# Altium PCB PCB1.PcbDoc (part 4 of 5)
Units mil, origin at the board's own origin, x right, y up, seen from the top; angles counter-clockwise.
Board outline 1280 x 1960 mil, 2 copper layers (Top Layer, Bottom Layer); 43 components, 63 nets, 300 pads, 93 vias.
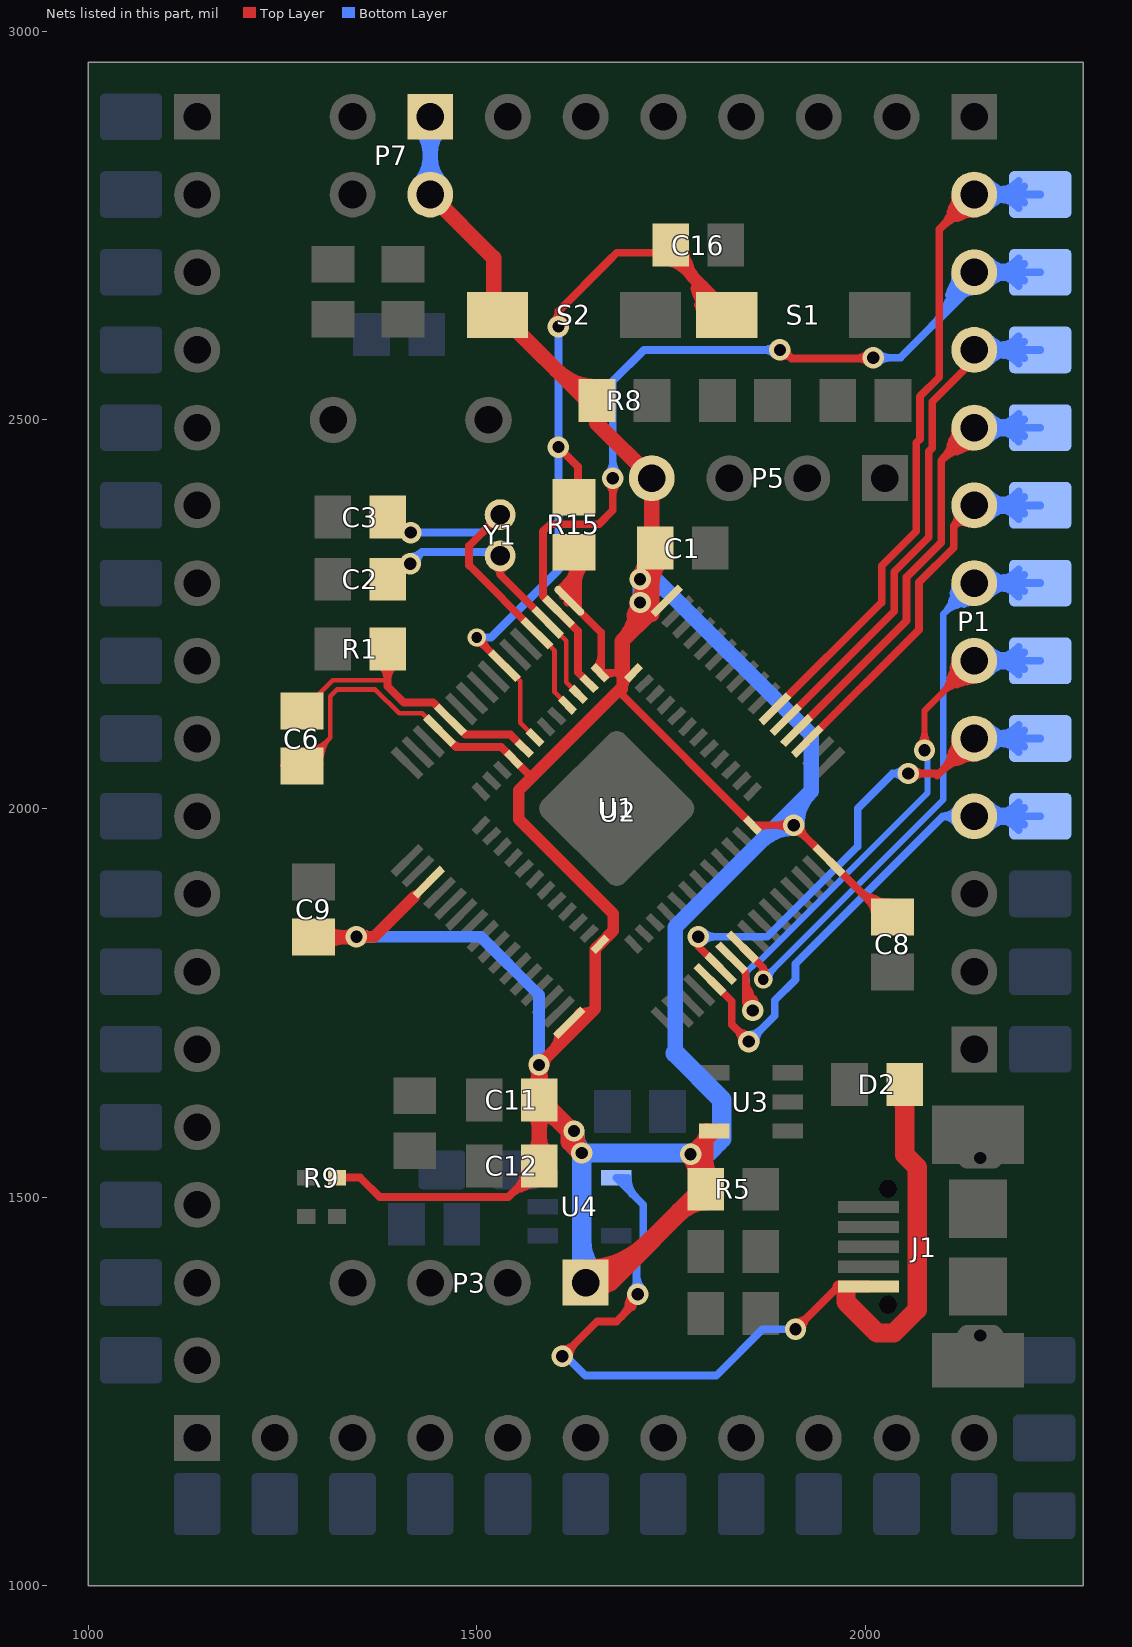
[diagram p4: the nets of this part, all layers, seen from the top]

## Via types
v1: diameter 27.56, hole 15.75, Top Layer to Bottom Layer, tented both sides, 87 vias
v2: diameter 23.62, hole 13.78, Top Layer to Bottom Layer, tented both sides, 6 vias

## Nets (pads, with @x,y where several pads share a name; then routed paths per layer and width w, separated by ;. In a path a pad name is that pad's centre, name@x,y a point inside that pad or via, vN(x,y) a via of type N, cw(c..) or ccw(c..) an arc to the next point about the centre after c; other vN are vias at no path point) (continued)
PC6: P1.4 pad.1@2225,1990 U2.37 | length 1805.9
  Top Layer w10: U2.37@1799.99,1780.06 1828,1752.05 1828,1722 v1(1850,1700) ; 1838.77,1709.15 ccw(c1852.64,1712.87) v1@1849.76,1698.8 ; 1840.85,1711.23 cw(c1837.13,1697.36) v1@1851.2,1700.24 ; 1835.01,1714.99 cw(c1820.02,1700) 1841.22,1700 ccw(c1820.02,1700) 1835.01,1714.99 ; 1835.01,1714.99 ccw(c1850,1729.98) 1850,1708.78 cw(c1850,1729.98) 1835.01,1714.99
  Bottom Layer w10: v1(1850,1700) 1883.22,1733.18 1883.22,1753.03 1910,1779.81 1910,1800.22 2099.78,1990 ; P1.4@2160.62,1976.72 cw(c2174.28,1967.93) 2178.48,1983.61 cw(c2184.22,2005.04) P1.4@2163.22,1997.9 ; P1.4@2160.62,2003.28 ccw(c2174.28,2012.07) 2178.48,1996.39 ccw(c2184.22,1974.96) P1.4@2163.22,1982.1 ; pad.1@2225,1990 P1.4@2140,1990 2099.78,1990 ; 2099.78,1990 cw(c2099.78,1969.28) 2118.19,1978.77 ccw(c2099.78,1969.28) 2099.78,1990 ; 2099.78,1990 ccw(c2099.78,2010.72) 2118.19,2001.23 cw(c2099.78,2010.72) 2099.78,1990 ; P1.4@2154.64,1990 cw(c2154.64,1929.64) 2197.32,1972.32 ccw(c2154.64,1929.64) P1.4@2154.64,1990 ; P1.4@2154.64,1990 ccw(c2154.64,2050.36) 2197.32,2007.68 cw(c2154.64,2050.36) P1.4@2154.64,1990 ; 2175.07,1990 cw(c2175.07,2025.07) 2150.27,2000.27 ccw(c2175.07,2025.07) 2175.07,1990 ; 2175.07,1990 ccw(c2175.07,1954.93) 2150.27,1979.73 cw(c2175.07,1954.93) 2175.07,1990 ; 2176.44,1983.9 cw(c2180.44,1968.97) pad.1@2193.64,1977.01 ; 2176.44,1983.9 ccw(c2170.88,2004.65) pad.1@2191.27,1997.88 ; 2176.44,1983.9 cw(c2180.44,1968.97) pad.1@2193.64,1977.01 ; 2176.44,1983.9 ccw(c2170.88,2004.65) pad.1@2191.27,1997.88 ; 2176.44,1983.9 cw(c2180.44,1968.97) pad.1@2193.64,1977.01 ; 2176.44,1983.9 ccw(c2170.88,2004.65) pad.1@2191.27,1997.88 ; 2176.44,1996.1 cw(c2170.88,1975.35) pad.1@2191.27,1982.12 ; 2176.44,1996.1 ccw(c2180.44,2011.03) pad.1@2193.64,2002.99 ; 2176.44,1996.1 cw(c2170.88,1975.35) pad.1@2191.27,1982.12 ; 2176.44,1996.1 ccw(c2180.44,2011.03) pad.1@2193.64,2002.99 ; 2176.44,1996.1 cw(c2170.88,1975.35) pad.1@2191.27,1982.12 ; 2176.44,1996.1 ccw(c2180.44,2011.03) pad.1@2193.64,2002.99 ; 2178.79,1990 cw(c2178.79,1953.79) 2204.39,1979.39 ccw(c2178.79,1953.79) 2178.79,1990 ; 2178.79,1990 ccw(c2178.79,2026.21) 2204.39,2000.61 cw(c2178.79,2026.21) 2178.79,1990 ; pad.1@2199.21,1990 cw(c2199.21,2049.21) 2157.34,2007.34 ccw(c2199.21,2049.21) pad.1@2199.21,1990 ; pad.1@2199.21,1990 ccw(c2199.21,1930.79) 2157.34,1972.66 cw(c2199.21,1930.79) pad.1@2199.21,1990 ; v1@1850,1708.78 ccw(c1850,1730.08) 1865.06,1715.02 cw(c1850,1730.08) v1@1850,1708.78 ; v1@1858.78,1700 cw(c1879.87,1700) 1864.96,1714.91 ccw(c1879.87,1700) v1@1858.78,1700
PC7: P1.5 pad.1@2225,2090 U2.38 | length 2145.3
  Top Layer w10: v1(1785,1835) 1785,1822.88 U2.38@1813.91,1793.98 ; v1(2055,2045) 2090,2045 2092.5,2042.5 P1.5@2140,2090 ; 2109.48,2067.65 cw(c2146.61,2057.7) P1.5@2138.9,2095.36 ; 2117.65,2059.48 ccw(c2107.7,2096.61) P1.5@2145.36,2088.9 ; 2076.2,2045 cw(c2076.2,2066.2) 2061.21,2051.21 ccw(c2076.2,2066.2) 2076.2,2045 ; 2076.2,2045 ccw(c2076.2,2023.8) 2061.21,2038.79 cw(c2076.2,2023.8) 2076.2,2045 ; 2098.13,2048.13 cw(c2140,2006.26) 2140,2065.47 ccw(c2140,2006.26) 2098.13,2048.13 ; 2098.13,2048.13 ccw(c2056.26,2090) 2115.47,2090 cw(c2056.26,2090) 2098.13,2048.13 ; 2115.2,2065.2 cw(c2140,2040.4) 2140,2075.47 ccw(c2140,2040.4) 2115.2,2065.2 ; 2115.2,2065.2 ccw(c2090.4,2090) 2125.47,2090 cw(c2090.4,2090) 2115.2,2065.2
  Bottom Layer w10: v1(1785,1835) 1873.79,1835 1990,1951.21 1990,2000 2035,2045 ; v1@2065,2045 2035,2045 ; P1.5@2140,2090 pad.1@2225,2090 ; P1.5@2160.62,2076.72 cw(c2174.28,2067.93) 2178.48,2083.61 cw(c2184.22,2105.04) P1.5@2163.22,2097.9 ; P1.5@2160.62,2103.28 ccw(c2174.28,2112.07) 2178.48,2096.39 ccw(c2184.22,2074.96) P1.5@2163.22,2082.1 ; 1806.2,1835 cw(c1806.2,1856.2) 1791.21,1841.21 ccw(c1806.2,1856.2) 1806.2,1835 ; 1806.2,1835 ccw(c1806.2,1813.8) 1791.21,1828.79 cw(c1806.2,1813.8) 1806.2,1835 ; 2035,2045 cw(c2035,2026.61) 2048.54,2039.06 ccw(c2035,2026.61) 2035,2045 ; 2035,2045 ccw(c2035,2063.39) 2048.54,2050.94 cw(c2035,2063.39) 2035,2045 ; P1.5@2154.64,2090 cw(c2154.64,2029.64) 2197.32,2072.32 ccw(c2154.64,2029.64) P1.5@2154.64,2090 ; P1.5@2154.64,2090 ccw(c2154.64,2150.36) 2197.32,2107.68 cw(c2154.64,2150.36) P1.5@2154.64,2090 ; 2175.07,2090 cw(c2175.07,2125.07) 2150.27,2100.27 ccw(c2175.07,2125.07) 2175.07,2090 ; 2175.07,2090 ccw(c2175.07,2054.93) 2150.27,2079.73 cw(c2175.07,2054.93) 2175.07,2090 ; 2176.44,2083.9 cw(c2180.44,2068.97) pad.1@2193.64,2077.01 ; 2176.44,2083.9 ccw(c2170.88,2104.65) pad.1@2191.27,2097.88 ; 2176.44,2083.9 cw(c2180.44,2068.97) pad.1@2193.64,2077.01 ; 2176.44,2083.9 ccw(c2170.88,2104.65) pad.1@2191.27,2097.88 ; 2176.44,2083.9 cw(c2180.44,2068.97) pad.1@2193.64,2077.01 ; 2176.44,2083.9 ccw(c2170.88,2104.65) pad.1@2191.27,2097.88 ; 2176.44,2096.1 cw(c2170.88,2075.35) pad.1@2191.27,2082.12 ; 2176.44,2096.1 ccw(c2180.44,2111.03) pad.1@2193.64,2102.99 ; 2176.44,2096.1 cw(c2170.88,2075.35) pad.1@2191.27,2082.12 ; 2176.44,2096.1 ccw(c2180.44,2111.03) pad.1@2193.64,2102.99 ; 2176.44,2096.1 cw(c2170.88,2075.35) pad.1@2191.27,2082.12 ; 2176.44,2096.1 ccw(c2180.44,2111.03) pad.1@2193.64,2102.99 ; 2178.79,2090 cw(c2178.79,2053.79) 2204.39,2079.39 ccw(c2178.79,2053.79) 2178.79,2090 ; 2178.79,2090 ccw(c2178.79,2126.21) 2204.39,2100.61 cw(c2178.79,2126.21) 2178.79,2090 ; pad.1@2199.21,2090 cw(c2199.21,2149.21) 2157.34,2107.34 ccw(c2199.21,2149.21) pad.1@2199.21,2090 ; pad.1@2199.21,2090 ccw(c2199.21,2030.79) 2157.34,2072.66 cw(c2199.21,2030.79) pad.1@2199.21,2090
PC8: P1.6 pad.1@2225,2190 U2.39 | length 2879.8
  Top Layer w8: v1(2076,2075) 2076,2126 P1.6@2140,2190 ; 2105.21,2155.45 cw(c2149.51,2143.58) P1.6@2140.31,2188.5 ; 2105.45,2155.21 ccw(c2093.58,2199.51) P1.6@2138.5,2190.31 ; 2108.57,2167.96 cw(c2146.6,2157.76) P1.6@2138.7,2196.34 ; 2111.27,2162 cw(c2130.54,2151.85) P1.6@2135.78,2172.99 ; 2111.92,2180.46 cw(c2143.7,2171.95) P1.6@2137.1,2204.18 ; 2112,2161.27 ccw(c2101.85,2180.54) P1.6@2122.99,2185.78 ; 2114.25,2167.66 ccw(c2097.1,2176.7) P1.6@2115.62,2182.44 ; P1.6@2115.59,2182.53 cw(c2094.02,2175.92) 2110.08,2160.08 ; P1.6@2115.64,2182.38 cw(c2094.58,2175.79) 2110.08,2160.08 ; P1.6@2115.68,2182.24 cw(c2095.07,2175.67) 2110.47,2160.47 ; P1.6@2115.73,2182.09 cw(c2095.61,2175.53) 2110.47,2160.47 ; 2116.03,2171.03 cw(c2133.07,2162.06) P1.6@2137.71,2180.75 ; 2117.66,2164.25 cw(c2126.7,2147.1) P1.6@2132.44,2165.62 ; 2117.96,2158.57 ccw(c2107.76,2196.6) P1.6@2146.34,2188.7 ; 2121.03,2166.03 ccw(c2112.06,2183.07) P1.6@2130.75,2187.71 ; 2130.46,2161.92 ccw(c2121.95,2193.7) P1.6@2154.18,2187.1 ; P1.6@2132.09,2165.73 ccw(c2125.53,2145.61) 2110.47,2160.47 ; P1.6@2132.24,2165.68 ccw(c2125.67,2145.07) 2110.47,2160.47 ; P1.6@2132.38,2165.64 ccw(c2125.79,2144.58) 2110.08,2160.08 ; P1.6@2132.53,2165.59 ccw(c2125.92,2144.02) 2110.08,2160.08 ; 2076,2098.61 cw(c2052.39,2098.61) 2069.08,2081.92 ccw(c2052.39,2098.61) 2076,2098.61 ; 2076,2098.61 ccw(c2099.61,2098.61) 2082.92,2081.92 cw(c2099.61,2098.61) 2076,2098.61 ; 2096.42,2146.42 cw(c2140,2102.84) 2140,2164.47 ccw(c2140,2102.84) 2096.42,2146.42 ; 2096.42,2146.42 ccw(c2052.84,2190) 2114.47,2190 cw(c2052.84,2190) 2096.42,2146.42 ; 2110.08,2160.08 cw(c2140,2130.16) 2140,2172.47 ccw(c2140,2130.16) 2110.08,2160.08 ; 2110.08,2160.08 ccw(c2080.16,2190) 2122.47,2190 cw(c2080.16,2190) 2110.08,2160.08
  Top Layer w9: U2.39@1827.83,1807.9 1845.62,1790.1 1845.62,1749.38 v1(1855,1740) ; v1@1846.89,1744.51 ccw(c1837.86,1749.55) 1846.81,1754.72 ccw(c1856.31,1760.2) v1@1855.6,1749.26 ; v1@1848.04,1746.13 ccw(c1834.89,1757.72) 1850.06,1766.48 ; v1@1854.79,1740.18 ccw(c1844.81,1748.98) 1856.33,1755.63 ; U2.39@1841.62,1793.4 cw(c1831.95,1783.73) 1845.62,1783.73 ccw(c1831.95,1783.73) U2.39@1841.62,1793.4 ; U2.39@1841.86,1793.27 cw(c1840.83,1788.59) 1845.62,1788.59 ccw(c1840.83,1788.59) U2.39@1841.86,1793.27 ; 1845.62,1763.32 ccw(c1878.32,1763.32) 1855.2,1740.2 cw(c1878.32,1763.32) 1845.62,1763.32 ; 1845.62,1785.04 ccw(c1900.04,1785.04) 1861.56,1746.56 cw(c1900.04,1785.04) 1845.62,1785.04
  Bottom Layer w8: 1846.75,1753.25 1846.75,1789.03 1859.53,1801.81 1861.81,1801.81 2080,2020 v1@2080,2075
  Bottom Layer w10: P1.6@2140,2190 pad.1@2225,2190 ; P1.6@2160.62,2176.72 cw(c2174.28,2167.93) 2178.48,2183.61 cw(c2184.22,2205.04) P1.6@2163.22,2197.9 ; P1.6@2160.62,2203.28 ccw(c2174.28,2212.07) 2178.48,2196.39 ccw(c2184.22,2174.96) P1.6@2163.22,2182.1 ; P1.6@2154.64,2190 cw(c2154.64,2129.64) 2197.32,2172.32 ccw(c2154.64,2129.64) P1.6@2154.64,2190 ; P1.6@2154.64,2190 ccw(c2154.64,2250.36) 2197.32,2207.68 cw(c2154.64,2250.36) P1.6@2154.64,2190 ; 2175.07,2190 cw(c2175.07,2225.07) 2150.27,2200.27 ccw(c2175.07,2225.07) 2175.07,2190 ; 2175.07,2190 ccw(c2175.07,2154.93) 2150.27,2179.73 cw(c2175.07,2154.93) 2175.07,2190 ; 2176.44,2183.9 cw(c2180.44,2168.97) pad.1@2193.64,2177.01 ; 2176.44,2183.9 ccw(c2170.88,2204.65) pad.1@2191.27,2197.88 ; 2176.44,2183.9 cw(c2180.44,2168.97) pad.1@2193.64,2177.01 ; 2176.44,2183.9 ccw(c2170.88,2204.65) pad.1@2191.27,2197.88 ; 2176.44,2183.9 cw(c2180.44,2168.97) pad.1@2193.64,2177.01 ; 2176.44,2183.9 ccw(c2170.88,2204.65) pad.1@2191.27,2197.88 ; 2176.44,2196.1 cw(c2170.88,2175.35) pad.1@2191.27,2182.12 ; 2176.44,2196.1 ccw(c2180.44,2211.03) pad.1@2193.64,2202.99 ; 2176.44,2196.1 cw(c2170.88,2175.35) pad.1@2191.27,2182.12 ; 2176.44,2196.1 ccw(c2180.44,2211.03) pad.1@2193.64,2202.99 ; 2176.44,2196.1 cw(c2170.88,2175.35) pad.1@2191.27,2182.12 ; 2176.44,2196.1 ccw(c2180.44,2211.03) pad.1@2193.64,2202.99 ; 2178.79,2190 cw(c2178.79,2153.79) 2204.39,2179.39 ccw(c2178.79,2153.79) 2178.79,2190 ; 2178.79,2190 ccw(c2178.79,2226.21) 2204.39,2200.61 cw(c2178.79,2226.21) 2178.79,2190 ; pad.1@2199.21,2190 cw(c2199.21,2249.21) 2157.34,2207.34 ccw(c2199.21,2249.21) pad.1@2199.21,2190 ; pad.1@2199.21,2190 ccw(c2199.21,2130.79) 2157.34,2172.66 cw(c2199.21,2130.79) pad.1@2199.21,2190
PC9: P1.7 pad.1@2225,2290 U2.40 | length 2245.3
  Top Layer w10: U2.40@1841.75,1821.81 1868.56,1795 ; v2(1868.56,1780) 1868.56,1795 ; 1868.56,1795 cw(c1855.45,1795) 1864.08,1785.13 ccw(c1855.45,1795) 1868.56,1795 ; 1868.56,1795 ccw(c1881.67,1795) 1873.04,1785.13 cw(c1881.67,1795) 1868.56,1795
  Bottom Layer w8: v2(1868.56,1780) 2100,2011.44 2100,2250 ; 2109.3,2262.57 cw(c2153.84,2253.57) P1.7@2137.7,2296.05 ; 2112.17,2276.79 cw(c2147.75,2269.6) P1.7@2134.86,2303.53 ; 2112.57,2259.3 ccw(c2103.57,2303.84) P1.7@2146.05,2287.7 ; 2126.79,2262.17 ccw(c2119.6,2297.75) P1.7@2153.53,2284.86 ; P1.7@2140,2290 2100,2250 ; 1881.9,1793.33 cw(c1868.56,1806.67) 1868.56,1787.81 ccw(c1868.56,1806.67) 1881.9,1793.33 ; 1881.9,1793.33 ccw(c1895.23,1780) 1876.37,1780 cw(c1895.23,1780) 1881.9,1793.33 ; 2100,2250 cw(c2135.29,2214.71) 2138.41,2264.52 ccw(c2135.29,2214.71) 2100,2250 ; 2100,2250 ccw(c2064.71,2285.29) 2114.52,2288.41 cw(c2064.71,2285.29) 2100,2250 ; 2112.54,2262.54 cw(c2136.77,2238.31) 2138.91,2272.51 ccw(c2136.77,2238.31) 2112.54,2262.54 ; 2112.54,2262.54 ccw(c2088.31,2286.77) 2122.51,2288.91 cw(c2088.31,2286.77) 2112.54,2262.54
  Bottom Layer w10: P1.7@2140,2290 pad.1@2225,2290 ; P1.7@2160.62,2276.72 cw(c2174.28,2267.93) 2178.48,2283.61 cw(c2184.22,2305.04) P1.7@2163.22,2297.9 ; P1.7@2160.62,2303.28 ccw(c2174.28,2312.07) 2178.48,2296.39 ccw(c2184.22,2274.96) P1.7@2163.22,2282.1 ; P1.7@2154.64,2290 cw(c2154.64,2229.64) 2197.32,2272.32 ccw(c2154.64,2229.64) P1.7@2154.64,2290 ; P1.7@2154.64,2290 ccw(c2154.64,2350.36) 2197.32,2307.68 cw(c2154.64,2350.36) P1.7@2154.64,2290 ; 2175.07,2290 cw(c2175.07,2325.07) 2150.27,2300.27 ccw(c2175.07,2325.07) 2175.07,2290 ; 2175.07,2290 ccw(c2175.07,2254.93) 2150.27,2279.73 cw(c2175.07,2254.93) 2175.07,2290 ; 2176.44,2283.9 cw(c2180.44,2268.97) pad.1@2193.64,2277.01 ; 2176.44,2283.9 ccw(c2170.88,2304.65) pad.1@2191.27,2297.88 ; 2176.44,2283.9 cw(c2180.44,2268.97) pad.1@2193.64,2277.01 ; 2176.44,2283.9 ccw(c2170.88,2304.65) pad.1@2191.27,2297.88 ; 2176.44,2283.9 cw(c2180.44,2268.97) pad.1@2193.64,2277.01 ; 2176.44,2283.9 ccw(c2170.88,2304.65) pad.1@2191.27,2297.88 ; 2176.44,2296.1 cw(c2170.88,2275.35) pad.1@2191.27,2282.12 ; 2176.44,2296.1 ccw(c2180.44,2311.03) pad.1@2193.64,2302.99 ; 2176.44,2296.1 cw(c2170.88,2275.35) pad.1@2191.27,2282.12 ; 2176.44,2296.1 ccw(c2180.44,2311.03) pad.1@2193.64,2302.99 ; 2176.44,2296.1 cw(c2170.88,2275.35) pad.1@2191.27,2282.12 ; 2176.44,2296.1 ccw(c2180.44,2311.03) pad.1@2193.64,2302.99 ; 2178.79,2290 cw(c2178.79,2253.79) 2204.39,2279.39 ccw(c2178.79,2253.79) 2178.79,2290 ; 2178.79,2290 ccw(c2178.79,2326.21) 2204.39,2300.61 cw(c2178.79,2326.21) 2178.79,2290 ; pad.1@2199.21,2290 cw(c2199.21,2349.21) 2157.34,2307.34 ccw(c2199.21,2349.21) pad.1@2199.21,2290 ; pad.1@2199.21,2290 ccw(c2199.21,2230.79) 2157.34,2272.66 cw(c2199.21,2230.79) pad.1@2199.21,2290
PC10: P1.8 pad.1@2225,2390 U2.51 | length 1484
  Top Layer w10: U2.51@1925.26,2086.28 2069,2230.02 2069,2291.12 2113.53,2335.65 2113.53,2363.53 ; P1.8@2140,2390 2113.53,2363.53 ; 2113.53,2363.53 cw(c2125.06,2352) 2131.03,2367.17 ccw(c2125.06,2352) 2113.53,2363.53 ; 2113.53,2363.53 ccw(c2102,2375.06) 2117.17,2381.03 cw(c2102,2375.06) 2113.53,2363.53
  Bottom Layer w10: P1.8@2140,2390 pad.1@2225,2390 ; P1.8@2160.62,2376.72 cw(c2174.28,2367.93) 2178.48,2383.61 cw(c2184.22,2405.04) P1.8@2163.22,2397.9 ; P1.8@2160.62,2403.28 ccw(c2174.28,2412.07) 2178.48,2396.39 ccw(c2184.22,2374.96) P1.8@2163.22,2382.1 ; P1.8@2154.64,2390 cw(c2154.64,2329.64) 2197.32,2372.32 ccw(c2154.64,2329.64) P1.8@2154.64,2390 ; P1.8@2154.64,2390 ccw(c2154.64,2450.36) 2197.32,2407.68 cw(c2154.64,2450.36) P1.8@2154.64,2390 ; 2175.07,2390 cw(c2175.07,2425.07) 2150.27,2400.27 ccw(c2175.07,2425.07) 2175.07,2390 ; 2175.07,2390 ccw(c2175.07,2354.93) 2150.27,2379.73 cw(c2175.07,2354.93) 2175.07,2390 ; 2176.44,2383.9 cw(c2180.44,2368.97) pad.1@2193.64,2377.01 ; 2176.44,2383.9 ccw(c2170.88,2404.65) pad.1@2191.27,2397.88 ; 2176.44,2383.9 cw(c2180.44,2368.97) pad.1@2193.64,2377.01 ; 2176.44,2383.9 ccw(c2170.88,2404.65) pad.1@2191.27,2397.88 ; 2176.44,2383.9 cw(c2180.44,2368.97) pad.1@2193.64,2377.01 ; 2176.44,2383.9 ccw(c2170.88,2404.65) pad.1@2191.27,2397.88 ; 2176.44,2396.1 cw(c2170.88,2375.35) pad.1@2191.27,2382.12 ; 2176.44,2396.1 ccw(c2180.44,2411.03) pad.1@2193.64,2402.99 ; 2176.44,2396.1 cw(c2170.88,2375.35) pad.1@2191.27,2382.12 ; 2176.44,2396.1 ccw(c2180.44,2411.03) pad.1@2193.64,2402.99 ; 2176.44,2396.1 cw(c2170.88,2375.35) pad.1@2191.27,2382.12 ; 2176.44,2396.1 ccw(c2180.44,2411.03) pad.1@2193.64,2402.99 ; 2178.79,2390 cw(c2178.79,2353.79) 2204.39,2379.39 ccw(c2178.79,2353.79) 2178.79,2390 ; 2178.79,2390 ccw(c2178.79,2426.21) 2204.39,2400.61 cw(c2178.79,2426.21) 2178.79,2390 ; pad.1@2199.21,2390 cw(c2199.21,2449.21) 2157.34,2407.34 ccw(c2199.21,2449.21) pad.1@2199.21,2390 ; pad.1@2199.21,2390 ccw(c2199.21,2330.79) 2157.34,2372.66 cw(c2199.21,2330.79) pad.1@2199.21,2390
PC11: P1.9 pad.1@2225,2490 U2.52 | length 1881.5
  Top Layer w10: U2.52@1911.34,2100.2 2053,2241.86 2053,2297.75 2097.53,2342.27 2097.53,2447.53 P1.9@2140,2490 ; 2109.48,2467.65 cw(c2146.61,2457.7) P1.9@2138.9,2495.36 ; 2117.65,2459.48 ccw(c2107.7,2496.61) P1.9@2145.36,2488.9 ; 2098.13,2448.13 cw(c2140,2406.26) 2140,2465.47 ccw(c2140,2406.26) 2098.13,2448.13 ; 2098.13,2448.13 ccw(c2056.26,2490) 2115.47,2490 cw(c2056.26,2490) 2098.13,2448.13 ; 2115.2,2465.2 cw(c2140,2440.4) 2140,2475.47 ccw(c2140,2440.4) 2115.2,2465.2 ; 2115.2,2465.2 ccw(c2090.4,2490) 2125.47,2490 cw(c2090.4,2490) 2115.2,2465.2
  Bottom Layer w10: P1.9@2140,2490 pad.1@2225,2490 ; P1.9@2160.62,2476.72 cw(c2174.28,2467.93) 2178.48,2483.61 cw(c2184.22,2505.04) P1.9@2163.22,2497.9 ; P1.9@2160.62,2503.28 ccw(c2174.28,2512.07) 2178.48,2496.39 ccw(c2184.22,2474.96) P1.9@2163.22,2482.1 ; P1.9@2154.64,2490 cw(c2154.64,2429.64) 2197.32,2472.32 ccw(c2154.64,2429.64) P1.9@2154.64,2490 ; P1.9@2154.64,2490 ccw(c2154.64,2550.36) 2197.32,2507.68 cw(c2154.64,2550.36) P1.9@2154.64,2490 ; 2175.07,2490 cw(c2175.07,2525.07) 2150.27,2500.27 ccw(c2175.07,2525.07) 2175.07,2490 ; 2175.07,2490 ccw(c2175.07,2454.93) 2150.27,2479.73 cw(c2175.07,2454.93) 2175.07,2490 ; 2176.44,2483.9 cw(c2180.44,2468.97) pad.1@2193.64,2477.01 ; 2176.44,2483.9 ccw(c2170.88,2504.65) pad.1@2191.27,2497.88 ; 2176.44,2483.9 cw(c2180.44,2468.97) pad.1@2193.64,2477.01 ; 2176.44,2483.9 ccw(c2170.88,2504.65) pad.1@2191.27,2497.88 ; 2176.44,2483.9 cw(c2180.44,2468.97) pad.1@2193.64,2477.01 ; 2176.44,2483.9 ccw(c2170.88,2504.65) pad.1@2191.27,2497.88 ; 2176.44,2496.1 cw(c2170.88,2475.35) pad.1@2191.27,2482.12 ; 2176.44,2496.1 ccw(c2180.44,2511.03) pad.1@2193.64,2502.99 ; 2176.44,2496.1 cw(c2170.88,2475.35) pad.1@2191.27,2482.12 ; 2176.44,2496.1 ccw(c2180.44,2511.03) pad.1@2193.64,2502.99 ; 2176.44,2496.1 cw(c2170.88,2475.35) pad.1@2191.27,2482.12 ; 2176.44,2496.1 ccw(c2180.44,2511.03) pad.1@2193.64,2502.99 ; 2178.79,2490 cw(c2178.79,2453.79) 2204.39,2479.39 ccw(c2178.79,2453.79) 2178.79,2490 ; 2178.79,2490 ccw(c2178.79,2526.21) 2204.39,2500.61 cw(c2178.79,2526.21) 2178.79,2490 ; pad.1@2199.21,2490 cw(c2199.21,2549.21) 2157.34,2507.34 ccw(c2199.21,2549.21) pad.1@2199.21,2490 ; pad.1@2199.21,2490 ccw(c2199.21,2430.79) 2157.34,2472.66 cw(c2199.21,2430.79) pad.1@2199.21,2490
PC12: P1.10 pad.1@2225,2590 U2.53 | length 1592
  Top Layer w10: U2.53@1897.43,2114.12 2037,2253.7 2037,2304.37 2081.53,2348.9 2081.53,2459.37 2086.06,2463.9 2086.06,2523.43 2140,2577.37 P1.10@2140,2590
  Bottom Layer w10: P1.10@2140,2590 pad.1@2225,2590 ; P1.10@2160.62,2576.72 cw(c2174.28,2567.93) 2178.48,2583.61 cw(c2184.22,2605.04) P1.10@2163.22,2597.9 ; P1.10@2160.62,2603.28 ccw(c2174.28,2612.07) 2178.48,2596.39 ccw(c2184.22,2574.96) P1.10@2163.22,2582.1 ; P1.10@2154.64,2590 cw(c2154.64,2529.64) 2197.32,2572.32 ccw(c2154.64,2529.64) P1.10@2154.64,2590 ; P1.10@2154.64,2590 ccw(c2154.64,2650.36) 2197.32,2607.68 cw(c2154.64,2650.36) P1.10@2154.64,2590 ; 2175.07,2590 cw(c2175.07,2625.07) 2150.27,2600.27 ccw(c2175.07,2625.07) 2175.07,2590 ; 2175.07,2590 ccw(c2175.07,2554.93) 2150.27,2579.73 cw(c2175.07,2554.93) 2175.07,2590 ; 2176.44,2583.9 cw(c2180.44,2568.97) pad.1@2193.64,2577.01 ; 2176.44,2583.9 ccw(c2170.88,2604.65) pad.1@2191.27,2597.88 ; 2176.44,2583.9 cw(c2180.44,2568.97) pad.1@2193.64,2577.01 ; 2176.44,2583.9 ccw(c2170.88,2604.65) pad.1@2191.27,2597.88 ; 2176.44,2583.9 cw(c2180.44,2568.97) pad.1@2193.64,2577.01 ; 2176.44,2583.9 ccw(c2170.88,2604.65) pad.1@2191.27,2597.88 ; 2176.44,2596.1 cw(c2170.88,2575.35) pad.1@2191.27,2582.12 ; 2176.44,2596.1 ccw(c2180.44,2611.03) pad.1@2193.64,2602.99 ; 2176.44,2596.1 cw(c2170.88,2575.35) pad.1@2191.27,2582.12 ; 2176.44,2596.1 ccw(c2180.44,2611.03) pad.1@2193.64,2602.99 ; 2176.44,2596.1 cw(c2170.88,2575.35) pad.1@2191.27,2582.12 ; 2176.44,2596.1 ccw(c2180.44,2611.03) pad.1@2193.64,2602.99 ; 2178.79,2590 cw(c2178.79,2553.79) 2204.39,2579.39 ccw(c2178.79,2553.79) 2178.79,2590 ; 2178.79,2590 ccw(c2178.79,2626.21) 2204.39,2600.61 cw(c2178.79,2626.21) 2178.79,2590 ; pad.1@2199.21,2590 cw(c2199.21,2649.21) 2157.34,2607.34 ccw(c2199.21,2649.21) pad.1@2199.21,2590 ; pad.1@2199.21,2590 ccw(c2199.21,2530.79) 2157.34,2572.66 cw(c2199.21,2530.79) pad.1@2199.21,2590
PC13: P1.11 pad.1@2225,2690 U1.2 U2.2 | length 2997.4
  Top Layer w10: U1.2@1644.51,2160.77 1630,2175.28 1630,2228.43 U2.2@1605.12,2253.32 1585,2273.43 1585,2356.3 1594.51,2365.81 1657.12,2365.81 1675,2383.7 v1(1675,2425) ; v1(1890,2590) 1894,2590 1905,2579 ; v1(2010,2580) 2009,2579 1905,2579 ; 1675,2403.8 cw(c1696.2,2403.8) 1681.21,2418.79 ccw(c1696.2,2403.8) 1675,2403.8 ; 1675,2403.8 ccw(c1653.8,2403.8) 1668.79,2418.79 cw(c1653.8,2403.8) 1675,2403.8 ; 1905,2579 ccw(c1896.81,2570.81) 1892.94,2581.73 cw(c1896.81,2570.81) 1905,2579 ; v1@1898.78,2590 ccw(c1910.32,2590) 1902.16,2581.84 cw(c1910.32,2590) v1@1898.78,2590 ; 1986.39,2579 ccw(c1986.39,2603.61) 2003.79,2586.21 cw(c1986.39,2603.61) 1986.39,2579 ; 1991.22,2579 cw(c1991.22,2561.22) 2003.79,2573.79 ccw(c1991.22,2561.22) 1991.22,2579
  Bottom Layer w10: v1(1675,2425) 1675,2550 1715,2590 v1(1890,2590) ; v1(2010,2580) 2044.96,2580 2124.96,2660 ; 2102.47,2641.46 cw(c2166.56,2624.28) P1.11@2141.7,2685.8 ; 2107.66,2660.83 cw(c2157.15,2647.57) P1.11@2137.95,2695.07 ; 2118.36,2663.45 cw(c2148.35,2655.42) P1.11@2141.06,2685.6 ; P1.11@2160.62,2676.72 cw(c2174.28,2667.93) 2178.48,2683.61 cw(c2184.22,2705.04) P1.11@2163.22,2697.9 ; P1.11@2160.62,2703.28 ccw(c2174.28,2712.07) 2178.48,2696.39 ccw(c2184.22,2674.96) P1.11@2163.22,2682.1 ; pad.1@2225,2690 P1.11@2140,2690 2140,2675 2125,2660 ; 1675,2446.2 cw(c1653.8,2446.2) 1668.79,2431.21 ccw(c1653.8,2446.2) 1675,2446.2 ; 1675,2446.2 ccw(c1696.2,2446.2) 1681.21,2431.21 cw(c1696.2,2446.2) 1675,2446.2 ; 1868.8,2590 cw(c1868.8,2568.8) 1883.79,2583.79 ccw(c1868.8,2568.8) 1868.8,2590 ; 1868.8,2590 ccw(c1868.8,2611.2) 1883.79,2596.21 cw(c1868.8,2611.2) 1868.8,2590 ; 2031.2,2580 cw(c2031.2,2601.2) 2016.21,2586.21 ccw(c2031.2,2601.2) 2031.2,2580 ; 2031.2,2580 ccw(c2031.2,2558.8) 2016.21,2573.79 cw(c2031.2,2558.8) 2031.2,2580 ; 2124.96,2660 cw(c2138.25,2646.71) 2139.01,2665.49 ccw(c2138.25,2646.71) 2124.96,2660 ; 2125,2660 cw(c2138.29,2646.71) 2139.03,2665.49 ccw(c2138.29,2646.71) 2125,2660 ; P1.11@2154.64,2690 cw(c2154.64,2629.64) 2197.32,2672.32 ccw(c2154.64,2629.64) P1.11@2154.64,2690 ; P1.11@2154.64,2690 ccw(c2154.64,2750.36) 2197.32,2707.68 cw(c2154.64,2750.36) P1.11@2154.64,2690 ; 2175.07,2690 cw(c2175.07,2725.07) 2150.27,2700.27 ccw(c2175.07,2725.07) 2175.07,2690 ; 2175.07,2690 ccw(c2175.07,2654.93) 2150.27,2679.73 cw(c2175.07,2654.93) 2175.07,2690 ; 2176.44,2683.9 cw(c2180.44,2668.97) pad.1@2193.64,2677.01 ; 2176.44,2683.9 ccw(c2170.88,2704.65) pad.1@2191.27,2697.88 ; 2176.44,2683.9 cw(c2180.44,2668.97) pad.1@2193.64,2677.01 ; 2176.44,2683.9 ccw(c2170.88,2704.65) pad.1@2191.27,2697.88 ; 2176.44,2683.9 cw(c2180.44,2668.97) pad.1@2193.64,2677.01 ; 2176.44,2683.9 ccw(c2170.88,2704.65) pad.1@2191.27,2697.88 ; 2176.44,2696.1 cw(c2170.88,2675.35) pad.1@2191.27,2682.12 ; 2176.44,2696.1 ccw(c2180.44,2711.03) pad.1@2193.64,2702.99 ; 2176.44,2696.1 cw(c2170.88,2675.35) pad.1@2191.27,2682.12 ; 2176.44,2696.1 ccw(c2180.44,2711.03) pad.1@2193.64,2702.99 ; 2176.44,2696.1 cw(c2170.88,2675.35) pad.1@2191.27,2682.12 ; 2176.44,2696.1 ccw(c2180.44,2711.03) pad.1@2193.64,2702.99 ; 2178.79,2690 cw(c2178.79,2653.79) 2204.39,2679.39 ccw(c2178.79,2653.79) 2178.79,2690 ; 2178.79,2690 ccw(c2178.79,2726.21) 2204.39,2700.61 cw(c2178.79,2726.21) 2178.79,2690 ; pad.1@2199.21,2690 cw(c2199.21,2749.21) 2157.34,2707.34 ccw(c2199.21,2749.21) pad.1@2199.21,2690 ; pad.1@2199.21,2690 ccw(c2199.21,2630.79) 2157.34,2672.66 cw(c2199.21,2630.79) pad.1@2199.21,2690 ; 2087.55,2622.6 ccw(c2020.15,2690) 2115.47,2690 cw(c2020.15,2690) 2087.55,2622.6 ; 2104.62,2639.67 ccw(c2054.29,2690) 2125.47,2690 cw(c2054.29,2690) 2104.62,2639.67 ; 2121.7,2656.74 ccw(c2088.43,2690) 2135.47,2690 cw(c2088.43,2690) 2121.7,2656.74 ; 2123.66,2658.7 cw(c2140,2642.37) 2140,2665.47 ccw(c2140,2642.37) 2123.66,2658.7
PC14: C2.2 U1.3 U2.3 Y1.1 | length 465.4
  Top Layer w6: U2.3@1591.2,2239.4 1615,2215.6 1615,2162.44 U1.3@1630.59,2146.85 U1.3@1630.59,2147.24
  Top Layer w10: Y1.1@1530,2325 1530,2300.6 ; U2.3@1591.2,2239.4 1530,2300.6 ; 1530,2300.6 cw(c1542.35,2300.6) 1536.77,2311.62 ccw(c1542.35,2300.6) 1530,2300.6 ; 1530,2300.6 ccw(c1517.65,2300.6) 1523.23,2311.62 cw(c1517.65,2300.6) 1530,2300.6
  Bottom Layer w10: v1(1414.16,2315) 1429.16,2330 ; Y1.1@1530,2325 1525,2330 1429.16,2330 ; 1429.15,2329.99 cw(c1414.16,2344.98) 1414.16,2323.78 ccw(c1414.16,2344.98) 1429.15,2329.99 ; 1429.15,2329.99 ccw(c1444.14,2315) 1422.94,2315 cw(c1444.14,2315) 1429.15,2329.99
PC15: C3.2 U1.4 U2.4 Y1.2 | length 438.6
  Top Layer w6: U2.4@1577.28,2225.48 1600,2202.76 1600,2149.6 U1.4@1616.67,2132.93
  Top Layer w10: Y1.2@1530,2378 1490,2338 1490,2312.76 U2.4@1577.28,2225.48
  Bottom Layer w10: v1(1415,2355) 1507,2355 Y1.2@1530,2378
PD2: P1.12 pad.1@2225,2790 U2.54 | length 2164.9
  Top Layer w10: U2.54@1883.51,2128.04 2020.23,2264.77 ; 2021,2264.77 2021,2312.1 2065.53,2356.63 2065.53,2470.53 2070.06,2475.06 2070.06,2530.06 2095,2555 2095,2745 P1.12@2140,2790 ; 2109.48,2767.65 cw(c2146.61,2757.7) P1.12@2138.9,2795.36 ; 2117.65,2759.48 ccw(c2107.7,2796.61) P1.12@2145.36,2788.9 ; 2098.13,2748.13 cw(c2140,2706.26) 2140,2765.47 ccw(c2140,2706.26) 2098.13,2748.13 ; 2098.13,2748.13 ccw(c2056.26,2790) 2115.47,2790 cw(c2056.26,2790) 2098.13,2748.13 ; 2115.2,2765.2 cw(c2140,2740.4) 2140,2775.47 ccw(c2140,2740.4) 2115.2,2765.2 ; 2115.2,2765.2 ccw(c2090.4,2790) 2125.47,2790 cw(c2090.4,2790) 2115.2,2765.2
  Bottom Layer w10: P1.12@2140,2790 pad.1@2225,2790 ; P1.12@2160.62,2776.72 cw(c2174.28,2767.93) 2178.48,2783.61 cw(c2184.22,2805.04) P1.12@2163.22,2797.9 ; P1.12@2160.62,2803.28 ccw(c2174.28,2812.07) 2178.48,2796.39 ccw(c2184.22,2774.96) P1.12@2163.22,2782.1 ; P1.12@2154.64,2790 cw(c2154.64,2729.64) 2197.32,2772.32 ccw(c2154.64,2729.64) P1.12@2154.64,2790 ; P1.12@2154.64,2790 ccw(c2154.64,2850.36) 2197.32,2807.68 cw(c2154.64,2850.36) P1.12@2154.64,2790 ; 2175.07,2790 cw(c2175.07,2825.07) 2150.27,2800.27 ccw(c2175.07,2825.07) 2175.07,2790 ; 2175.07,2790 ccw(c2175.07,2754.93) 2150.27,2779.73 cw(c2175.07,2754.93) 2175.07,2790 ; 2176.44,2783.9 cw(c2180.44,2768.97) pad.1@2193.64,2777.01 ; 2176.44,2783.9 ccw(c2170.88,2804.65) pad.1@2191.27,2797.88 ; 2176.44,2783.9 cw(c2180.44,2768.97) pad.1@2193.64,2777.01 ; 2176.44,2783.9 ccw(c2170.88,2804.65) pad.1@2191.27,2797.88 ; 2176.44,2783.9 cw(c2180.44,2768.97) pad.1@2193.64,2777.01 ; 2176.44,2783.9 ccw(c2170.88,2804.65) pad.1@2191.27,2797.88 ; 2176.44,2796.1 cw(c2170.88,2775.35) pad.1@2191.27,2782.12 ; 2176.44,2796.1 ccw(c2180.44,2811.03) pad.1@2193.64,2802.99 ; 2176.44,2796.1 cw(c2170.88,2775.35) pad.1@2191.27,2782.12 ; 2176.44,2796.1 ccw(c2180.44,2811.03) pad.1@2193.64,2802.99 ; 2176.44,2796.1 cw(c2170.88,2775.35) pad.1@2191.27,2782.12 ; 2176.44,2796.1 ccw(c2180.44,2811.03) pad.1@2193.64,2802.99 ; 2178.79,2790 cw(c2178.79,2753.79) 2204.39,2779.39 ccw(c2178.79,2753.79) 2178.79,2790 ; 2178.79,2790 ccw(c2178.79,2826.21) 2204.39,2800.61 cw(c2178.79,2826.21) 2178.79,2790 ; pad.1@2199.21,2790 cw(c2199.21,2849.21) 2157.34,2807.34 ccw(c2199.21,2849.21) pad.1@2199.21,2790 ; pad.1@2199.21,2790 ccw(c2199.21,2730.79) 2157.34,2772.66 cw(c2199.21,2730.79) pad.1@2199.21,2790
RESET: C16.1 R15.2 S1.2 U1.7 U2.7 | length 1895.1
  Top Layer w6: U2.7@1535.52,2183.72 1555.81,2163.43 1555.81,2110.27 U1.7@1574.91,2091.17
  Top Layer w10: v2@1500,2219.24 U2.7@1535.52,2183.72 ; v1(1605,2620) 1605,2640 ; v1@1610,2460 1630,2440 R15.2@1630,2400.43 ; C16.1@1745.36,2702.92 cw(c1734.3,2655.18) 1775.88,2681.11 ; C16.1@1747.62,2712.66 cw(c1742.01,2688.44) C16.1@1763.1,2701.6 ; C16.1@1749.94,2722.39 cw(c1740.39,2688.4) 1774.49,2697.53 ; C16.1@1767.71,2716.86 ccw(c1807.56,2707.62) 1772.85,2685.97 ; 1780.02,2669.27 ccw(c1837.67,2681.82) S1.2@1809.08,2630.21 ; S1.2@1784.72,2647.69 ccw(c1823.43,2656.12) S1.2@1804.23,2621.47 ; 1790.64,2665.93 ccw(c1826.99,2673.85) S1.2@1813.39,2639.21 ; S1.2@1821.57,2645 C16.1@1760,2706.57 ; 1605,2640 cw(c1586.61,2640) 1599.06,2626.46 ccw(c1586.61,2640) 1605,2640 ; 1605,2640 ccw(c1623.39,2640) 1610.94,2626.46 cw(c1623.39,2640) 1605,2640 ; 1605,2640 1670,2705 1680,2715 1760,2715 C16.1@1760,2706.57 ; C16.1@1760,2706.57 cw(c1694.01,2640.58) 1787.23,2636.16 ccw(c1694.01,2640.58) C16.1@1760,2706.57 ; v2@1500,2213.19 cw(c1500,2198.58) 1510.33,2208.91 ccw(c1500,2198.58) v2@1500,2213.19 ; v2@1506.81,2220 ccw(c1525.09,2220) 1512.16,2207.08 cw(c1525.09,2220) v2@1506.81,2220 ; C16.1@1749.57,2702.44 cw(c1749.57,2667.28) 1774.43,2692.14 ccw(c1749.57,2667.28) C16.1@1749.57,2702.44 ; C16.1@1758.19,2721.06 ccw(c1788.8,2721.06) 1767.15,2699.42 cw(c1788.8,2721.06) C16.1@1758.19,2721.06 ; C16.1@1768.19,2721.06 ccw(c1822.94,2721.06) 1784.22,2682.35 cw(c1822.94,2721.06) C16.1@1768.19,2721.06 ; 1775.99,2690.58 cw(c1724.54,2639.13) 1797.22,2635.69 ccw(c1724.54,2639.13) 1775.99,2690.58 ; 1791.98,2674.59 cw(c1755.07,2637.69) 1807.21,2635.21 ccw(c1755.07,2637.69) 1791.98,2674.59
  Bottom Layer w10: v2(1500,2220) 1518.16,2220 1605,2306.84 1605,2325 v1(1605,2465) v1(1605,2620)
VCC: C1.1 C6.1 C8.1 C9.1 C11.1 C12.1 P3.1 P5.4 P7.1 P7.2 R5.2 R8.1 R9.1 R15.1 S2.2 U1.1 U1.9 U1.24 U1.36 U1.48 U2.1 U2.13 U2.19 U2.32 U2.48 U2.64 U3.5 | length 10539.1
  Top Layer w6: C6.1@1250,2054.57 C6.1@1250,2056.25 ; C6.1@1269.64,2055.79 cw(c1295.87,2052.34) C6.1@1289.02,2077.89 ; C6.1@1275,2054.57 1311.56,2091.13 ; C6.1@1275.59,2055.01 cw(c1305.51,2051.06) 1297.7,2080.22 ; C6.1@1283.96,2046.65 ccw(c1262.34,2080.71) C6.1@1302.2,2074.5 ; U2.13@1452,2100.2 1429.89,2122.32 1400.07,2122.32 1369.39,2153 1320,2153 1311.56,2144.56 1311.56,2091.13 ; 1311.56,2091.13 ccw(c1341.4,2061.29) 1299.44,2056.77 cw(c1341.4,2061.29) 1311.56,2091.13 ; C6.1@1278.94,2069.19 ccw(c1278.94,2094.99) 1297.18,2076.75 cw(c1278.94,2094.99) C6.1@1278.94,2069.19 ; C6.1@1278.94,2075.19 ccw(c1278.94,2115.47) 1307.42,2086.99 cw(c1278.94,2115.47) C6.1@1278.94,2075.19 ; C6.1@1287.51,2055.49 cw(c1309.37,2057.84) 1293.82,2073.39 ccw(c1309.37,2057.84) C6.1@1287.51,2055.49 ; C6.1@1293.48,2056.13 cw(c1325.38,2059.57) 1302.69,2082.26 ccw(c1325.38,2059.57) C6.1@1293.48,2056.13
  Top Layer w10: C9.1@1290,1834.57 C9.1@1292.32,1832.25 ; R9.1@1320,1525 1350,1525 1375,1500 1540.43,1500 C12.1@1580.43,1540 ; 1420,1887.25 U2.19@1438.08,1905.33 ; U2.13@1452,2100.2 1473.21,2079 1531.4,2079 U1.9@1547.07,2063.33 1570,2040.4 1570,2039.51 ; 1556.97,1511.15 ccw(c1547.86,1545.15) C12.1@1581.76,1535.69 ; C11.1@1580.43,1625 C11.1@1580.43,1644.57 ; U2.1@1619.04,2267.24 U2.1@1630,2256.27 ; 1626.82,2292.46 cw(c1602.9,2312.56) U2.1@1604.9,2281.38 ; 1686.97,2146.15 U1.36@1854.69,1978.42 v1(1907.85,1978.42) U2.48@1953.1,1933.17 2025.84,1860.43 C8.1@2035,1860.43 ; 1686.97,2174.69 U1.1@1658.42,2174.69 1660,2176.26 1660,2226.27 U2.1@1630,2256.27 ; v1@1901.64,1972.22 ccw(c1886.65,1957.23) 1886.65,1978.42 ccw(c1886.65,1999.62) v1@1901.64,1984.63 ; v1@1907.85,1969.64 cw(c1907.85,1948.45) 1922.84,1963.44 cw(c1937.82,1978.42) v1@1916.63,1978.42 ; 2006.89,1885.53 cw(c1997.45,1850.29) C8.1@2032.38,1860.83 ; 1333.66,1525 cw(c1333.66,1536.69) 1325.39,1528.42 ccw(c1333.66,1536.69) 1333.66,1525 ; 1333.66,1525 ccw(c1333.66,1513.31) 1325.39,1521.58 cw(c1333.66,1513.31) 1333.66,1525 ; U2.1@1604.9,2281.38 ccw(c1571.2,2329.56) R15.1@1630,2329.56 ; U2.1@1604.9,2281.38 ccw(c1571.2,2329.56) R15.1@1630,2329.56 ; U2.1@1630,2256.27 R15.1@1630,2329.57 ; U2.13@1466.15,2086.06 ccw(c1483.19,2103.11) 1483.19,2079 cw(c1483.19,2103.11) U2.13@1466.15,2086.06 ; 1541.92,1501.49 cw(c1580.43,1462.98) 1580.43,1517.44 ccw(c1580.43,1462.98) 1541.92,1501.49 ; 1551.43,1510.99 ccw(c1526.36,1536.06) 1561.81,1536.06 cw(c1526.36,1536.06) 1551.43,1510.99 ; C12.1@1558.99,1518.56 cw(c1580.43,1497.12) 1580.43,1527.44 ccw(c1580.43,1497.12) C12.1@1558.99,1518.56 ; U2.1@1610.63,2273.18 ccw(c1584.62,2310.37) 1630,2310.37 cw(c1584.62,2310.37) U2.1@1610.63,2273.18 ; R15.1@1615.77,2316.4 cw(c1581.41,2282.04) 1630,2282.04 ccw(c1581.41,2282.04) R15.1@1615.77,2316.4 ; U2.1@1616.36,2264.99 ccw(c1598.05,2291.18) 1630,2291.18 cw(c1598.05,2291.18) U2.1@1616.36,2264.99 ; 1630,2287.18 cw(c1671.33,2287.18) 1642.1,2316.4 ccw(c1671.33,2287.18) 1630,2287.18 ; U1.1@1652.91,2180.2 ccw(c1635.8,2197.31) 1660,2197.31 cw(c1635.8,2197.31) U1.1@1652.91,2180.2 ; U1.1@1663.94,2169.18 cw(c1677.24,2155.87) 1677.24,2174.69 ccw(c1677.24,2155.87) U1.1@1663.94,2169.18 ; U1.36@1860.2,1972.91 cw(c1873.51,1959.6) 1873.51,1978.42 ccw(c1873.51,1959.6) U1.36@1860.2,1972.91 ; 1990.35,1895.92 ccw(c2031.06,1936.63) 2031.06,1879.06 cw(c2031.06,1936.63) 1990.35,1895.92 ; 2002.97,1883.3 cw(c1980.1,1860.43) 2012.44,1860.43 ccw(c1980.1,1860.43) 2002.97,1883.3 ; 2007.42,1878.85 ccw(c2031.06,1902.49) 2031.06,1869.06 cw(c2031.06,1902.49) 2007.42,1878.85
  Top Layer w15: C9.1@1292.32,1832.25 v1@1345,1832.25 ; v1(1345,1835) 1367.75,1835 1420,1887.25 ; C11.1@1580.43,1644.57 1580.43,1670.43 1652.5,1742.5 ; 1686.97,2174.69 1686.97,2156.47 1570,2039.51 1554,2023.5 1554,1986 1675.53,1864.47 1675.53,1842.42 U1.24@1658.42,1825.31 1652.5,1819.39 1652.5,1742.5 ; 1322.32,1836.57 ccw(c1328.13,1858.27) v1@1341.31,1840.08 ; 1322.32,1836.57 ccw(c1328.13,1858.27) v1@1341.31,1840.08 ; 1322.32,1836.57 ccw(c1328.13,1858.27) v1@1341.31,1840.08 ; 1360.16,1835 cw(c1360.16,1850.16) 1349.44,1839.44 ccw(c1360.16,1850.16) 1360.16,1835 ; 1360.16,1835 ccw(c1360.16,1819.84) 1349.44,1830.56 cw(c1360.16,1819.84) 1360.16,1835 ; v1@1574.56,1666.86 cw(c1558.56,1657.62) 1576.41,1652.84 ; v1@1574.56,1666.86 cw(c1558.56,1657.62) 1576.41,1652.84 ; v1@1574.56,1666.86 cw(c1558.56,1657.62) 1576.41,1652.84 ; v1@1576.86,1664.56 cw(c1569.51,1651.83) 1583.71,1655.64 ; v1@1576.86,1664.56 cw(c1569.51,1651.83) 1583.71,1655.64 ; v1@1576.86,1664.56 cw(c1569.51,1651.83) 1583.71,1655.64 ; v1@1580.43,1667.86 cw(c1541.51,1667.86) 1569.03,1640.34 ccw(c1541.51,1667.86) v1@1580.43,1667.86 ; v1@1580.43,1667.86 ccw(c1619.36,1667.86) 1591.83,1640.34 cw(c1619.36,1667.86) v1@1580.43,1667.86 ; 1583.88,1655 cw(c1598.97,1659.05) v1@1585.44,1666.86 ; 1583.88,1655 cw(c1598.97,1659.05) v1@1585.44,1666.86 ; 1583.88,1655 cw(c1598.97,1659.05) v1@1585.44,1666.86 ; 1590.72,1680.72 cw(c1580,1691.44) 1580,1676.28 ccw(c1580,1691.44) 1590.72,1680.72 ; 1590.72,1680.72 ccw(c1601.44,1670) 1586.28,1670 cw(c1601.44,1670) 1590.72,1680.72 ; 1652.5,1742.5 cw(c1636.28,1758.71) 1632.8,1736.05 ccw(c1636.28,1758.71) 1652.5,1742.5 ; C9.1@1305.34,1823.17 cw(c1327.26,1801.25) 1327.26,1832.25 ccw(c1327.26,1801.25) C9.1@1305.34,1823.17 ; C9.1@1305.34,1845.97 ccw(c1338.46,1879.09) 1338.46,1832.25 cw(c1338.46,1879.09) C9.1@1305.34,1845.97 ; 1323.2,1832.25 ccw(c1323.2,1856.8) 1340.56,1839.44 cw(c1323.2,1856.8) 1323.2,1832.25 ; v1@1575.56,1665.56 cw(c1563.79,1653.79) 1580.43,1653.79 ccw(c1563.79,1653.79) v1@1575.56,1665.56 ; 1580.43,1655.89 cw(c1594.11,1655.89) 1584.44,1665.56 ccw(c1594.11,1655.89) 1580.43,1655.89 ; 1598.31,1688.31 ccw(c1576.39,1710.24) 1607.39,1710.24 cw(c1576.39,1710.24) 1598.31,1688.31 ; 1686.97,2153.57 cw(c1711.48,2153.57) 1694.19,2170.95 ccw(c1711.48,2153.57) 1686.97,2153.57 ; 1686.97,2158.5 cw(c1701.5,2158.5) 1694.82,2171.41 ccw(c1701.5,2158.5) 1686.97,2158.5
  Top Layer w20: P7.2@1440,2790 1521.57,2708.43 1521.57,2645 R8.1@1654.57,2512.01 ; C12.1@1580.43,1540 C11.1@1580.43,1605 ; P3.1@1640,1390 1670,1390 ; R8.1@1654.57,2525 R8.1@1654.57,2512.01 ; 1686.97,2174.69 1686.97,2215.28 ; 1702.56,2248.27 cw(c1723.64,2243.61) v1@1712.03,2261.81 ; v1@1707.54,2292.13 cw(c1697.71,2280.67) v1@1710.43,2272.53 ; v1@1708.89,2298.61 ccw(c1703.67,2315.53) C1.1@1721.38,2315.53 ; v1@1709.02,2298.65 ccw(c1699.81,2333.02) C1.1@1730.63,2315.23 ; v1@1710.71,2298.71 ccw(c1713.24,2311.83) 1724.81,2305.15 ; v1@1713.65,2265.98 cw(c1734.5,2271.57) 1715.81,2282.36 ; v1@1713.65,2295.98 cw(c1734.5,2301.57) C1.1@1715.81,2312.36 ; C1.1@1717.77,2324.25 cw(c1686.47,2306.18) v1@1721.38,2296.83 ; 1722.57,2301.27 cw(c1751.19,2293.61) C1.1@1736.38,2319.27 ; 1723.23,2251.55 1686.97,2215.28 ; 1725,2249.78 P5.4@1725,2425 1654.57,2495.43 ; v1@1778.65,1554.02 ccw(c1799.5,1548.43) 1780.81,1537.64 ; v1@1778.73,1554.4 ccw(c1800.05,1550.98) 1782.56,1538.33 ; R5.2@1783.57,1503.57 v1@1783.57,1563.06 ; R5.2@1792.89,1510 R5.2@1794.57,1510 1794.57,1574.05 ; U3.5@1805.51,1585 1794.57,1574.05 ; 1580.43,1588.18 cw(c1613.32,1588.18) 1590.07,1611.43 ccw(c1613.32,1588.18) 1580.43,1588.18 ; 1580.43,1588.18 ccw(c1547.55,1588.18) 1570.8,1611.43 cw(c1547.55,1588.18) 1580.43,1588.18 ; 1654.57,2495.43 cw(c1671.87,2495.43) 1662.19,2509.77 ccw(c1671.87,2495.43) 1654.57,2495.43 ; 1654.57,2495.43 ccw(c1637.27,2495.43) 1646.95,2509.77 cw(c1637.27,2495.43) 1654.57,2495.43 ; 1654.57,2495.43 R8.1@1654.57,2512.01 ; 1670,1390 cw(c1670,1403.28) 1657.86,1397.9 ccw(c1670,1403.28) 1670,1390 ; 1670,1390 ccw(c1670,1376.72) 1657.86,1382.1 cw(c1670,1376.72) 1670,1390 ; 1686.97,2215.29 ccw(c1640.33,2261.93) 1706.22,2264.83 cw(c1640.33,2261.93) 1686.97,2215.29 ; v1@1783.57,1563.05 ccw(c1831.25,1563.05) 1802.72,1524.85 cw(c1831.25,1563.05) v1@1783.57,1563.05 ; v1@1783.57,1563.06 1794.57,1574.05 ; 1794.57,1546.82 cw(c1761.68,1546.82) 1784.93,1523.57 ccw(c1761.68,1546.82) 1794.57,1546.82 ; 1794.57,1546.82 ccw(c1827.45,1546.82) 1804.2,1523.57 cw(c1827.45,1546.82) 1794.57,1546.82 ; C12.1@1570.8,1553.57 ccw(c1547.55,1576.82) 1580.43,1576.82 cw(c1547.55,1576.82) C12.1@1570.8,1553.57 ; 1580.43,1576.83 ccw(c1613.32,1576.83) 1590.07,1553.57 cw(c1613.32,1576.83) 1580.43,1576.83 ; 1602.41,2564.16 ccw(c1654.57,2616.32) 1654.57,2542.56 cw(c1654.57,2616.32) 1602.41,2564.16 ; v1@1707.33,2267.67 ccw(c1664.66,2310.34) 1725,2310.34 cw(c1664.66,2310.34) v1@1707.33,2267.67 ; v1@1707.33,2297.67 ccw(c1664.66,2340.34) 1725,2340.34 cw(c1664.66,2340.34) v1@1707.33,2297.67 ; U2.64@1725,2252.68 cw(c1730.58,2252.68) 1726.63,2256.63 ccw(c1730.58,2252.68) U2.64@1725,2252.68 ; 1725,2287.15 cw(c1773.48,2287.15) 1739.2,2321.43 ccw(c1773.48,2287.15) 1725,2287.15 ; v1@1772.33,1552.33 cw(c1745.19,1525.19) 1783.57,1525.19 ccw(c1745.19,1525.19) v1@1772.33,1552.33 ; v1@1772.62,1552.07 cw(c1735.11,1505.93) 1794.57,1505.93 ccw(c1735.11,1505.93) v1@1772.62,1552.07 ; 1788.98,1568.47 ccw(c1772.45,1585) 1795.83,1585 cw(c1772.45,1585) 1788.98,1568.47
  Top Layer w25: C11.1@1580.43,1625 v1@1620.43,1585 ; 1670,1390 R5.2@1783.57,1503.57 ; v1@1620.43,1585 ccw(c1652.49,1585) 1635.67,1557.71 cw(c1652.49,1585) v1@1620.43,1585 ; v1@1620.43,1585 1620.43,1571.18 v1(1635,1556.62) ; v1(1635,1556.62) cw(c1657.38,1579) 1626.26,1584.77 ccw(c1657.38,1579) v1(1635,1556.62) ; C11.1@1580.43,1609.94 cw(c1580.43,1573.59) 1606.14,1599.29 ccw(c1580.43,1573.59) C11.1@1580.43,1609.94 ; 1620.43,1570.89 cw(c1639.11,1570.89) 1625.9,1584.1 ccw(c1639.11,1570.89) 1620.43,1570.89 ; P3.1@1640,1382.03 ccw(c1640,1435.21) 1677.6,1397.6 cw(c1640,1435.21) P3.1@1640,1382.03 ; P3.1@1640,1407.03 ccw(c1640,1520.56) 1720.28,1440.28 cw(c1640,1520.56) P3.1@1640,1407.03 ; 1761.06,1481.06 cw(c1794.57,1447.56) 1794.57,1494.94 ccw(c1794.57,1447.56) 1761.06,1481.06
  Bottom Layer w15: v1(1345,1835) 1505,1835 1580,1760 v1(1580,1670) ; 1360.16,1835 cw(c1360.16,1850.16) 1349.44,1839.44 ccw(c1360.16,1850.16) 1360.16,1835 ; 1360.16,1835 ccw(c1360.16,1819.84) 1349.44,1830.56 cw(c1360.16,1819.84) 1360.16,1835 ; 1580,1685.16 cw(c1564.84,1685.16) 1575.56,1674.44 ccw(c1564.84,1685.16) 1580,1685.16 ; 1580,1685.16 ccw(c1595.16,1685.16) 1584.44,1674.44 cw(c1595.16,1685.16) 1580,1685.16
  Bottom Layer w20: P7.2@1440,2790 P7.1@1440,2890 ; v1(1710,2265) v1(1710,2295) 1730,2295 1930,2095 1930,2022.11 1755.22,1847.34 1755.22,1685.22 ; v1@1713.27,2296.89 ccw(c1731.97,2307.68) 1726.38,2286.83 ; 1864.63,1956.74 cw(c1907.85,1913.52) v1@1907.85,1974.64 ; 1891.63,1978.42 cw(c1904.47,1978.42) 1895.39,1987.5 ; 1898.77,1990.88 cw(c1907.85,1981.81) 1907.85,1994.64 ; v1@1911.63,1978.42 cw(c1972.75,1978.42) 1929.53,2021.65 ; 1440,2837.14 cw(c1392.86,2837.14) 1426.19,2803.81 ccw(c1392.86,2837.14) 1440,2837.14 ; 1440,2837.14 ccw(c1487.14,2837.14) 1453.81,2803.81 cw(c1487.14,2837.14) 1440,2837.14 ; 1440,2842.86 cw(c1487.14,2842.86) 1453.81,2876.19 ccw(c1487.14,2842.86) 1440,2842.86 ; 1440,2842.86 ccw(c1392.86,2842.86) 1426.19,2876.19 cw(c1392.86,2842.86) 1440,2842.86 ; v1@1710,2291.22 cw(c1710,2233.81) 1750.59,2274.41 ccw(c1710,2233.81) v1@1710,2291.22
  Bottom Layer w25: v1(1625,1585) 1625,1566.62 v1(1635,1556.62) ; 1755.22,1685.22 1815,1625.44 1815,1575 1796.62,1556.62 ; 1635,1420 ccw(c1649.41,1420) 1645.1,1406.25 cw(c1649.41,1420) 1635,1420 ; 1635,1420 v1(1635,1556.62) ; v1(1635,1556.62) cw(c1657.38,1579) 1626.26,1584.77 ccw(c1657.38,1579) v1(1635,1556.62) ; v1(1635,1556.62) 1796.62,1556.62 ; 1796.62,1556.62 cw(c1785.88,1567.35) 1775.85,1555.96 ccw(c1785.88,1567.35) 1796.62,1556.62 ; v1@1625,1583.85 ccw(c1662.23,1583.85) 1635.9,1557.52 cw(c1662.23,1583.85) v1@1625,1583.85 ; 1635,1443.18 ccw(c1693.18,1443.18) 1652.04,1402.04 cw(c1693.18,1443.18) 1635,1443.18 ; v1@1775,1556.28 ccw(c1775,1607.65) 1811.33,1571.33 cw(c1775,1607.65) v1@1775,1556.28
  other v1: 1775,1555
VCC5V: D2.1 J1.1 U4.4 | length 1738.5
  Top Layer w10: v1@1608.8,1295.24 cw(c1622.87,1292.36) 1619.15,1306.23 ; v1(1610,1295) 1655,1340 1680,1340 1700,1360 ; v1@1610.24,1293.8 ccw(c1607.36,1307.87) 1621.23,1304.15 ; 1694.68,1361.79 cw(c1716.3,1355.99) v1@1706.46,1376.1 ; v1@1700,1370 1700,1360 ; v1@1908.8,1330.24 cw(c1922.87,1327.36) 1919.15,1341.23 ; v1(1910,1330) J1.1@1964.82,1384.82 ; v1@1910.24,1328.8 ccw(c1907.36,1342.87) 1921.23,1339.15 ; 1624.99,1309.99 cw(c1610,1324.98) 1610,1303.78 ccw(c1610,1324.98) 1624.99,1309.99 ; 1624.99,1309.99 ccw(c1639.98,1295) 1618.78,1295 cw(c1639.98,1295) 1624.99,1309.99 ; 1700,1360 ccw(c1695.18,1364.82) 1700.35,1369.27 cw(c1695.18,1364.82) 1700,1360 ; 1924.99,1344.99 cw(c1910,1359.98) 1910,1338.78 ccw(c1910,1359.98) 1924.99,1344.99 ; 1924.99,1344.99 ccw(c1939.98,1330) 1918.78,1330 cw(c1939.98,1330) 1924.99,1344.99 ; 1686.36,1346.36 ccw(c1657.71,1375) 1698.22,1375 cw(c1657.71,1375) 1686.36,1346.36 ; 1700,1358.45 cw(c1707.79,1358.45) 1707.42,1366.23 ccw(c1707.79,1358.45) 1700,1358.45
  Top Layer w15: J1.1@1964.82,1384.82 J1.1@2004.13,1384.82
  Top Layer w25: 1975,1375 1975,1365 2015,1325 2036.5,1325 2066.5,1355 2066.5,1538.5 2050.43,1554.57 D2.1@2050.43,1645 ; 2050.43,1614.21 cw(c2077.28,1614.21) 2058.3,1633.2 ccw(c2077.28,1614.21) 2050.43,1614.21 ; 2050.43,1614.21 ccw(c2023.58,1614.21) 2042.57,1633.2 cw(c2023.58,1614.21) 2050.43,1614.21
  Bottom Layer w10: v1@1610,1300 1639.78,1270.22 1807.85,1270.22 1867.63,1330 v1(1910,1330) ; U4.4@1686.91,1520.61 cw(c1673.08,1496.65) 1699.8,1503.81 ; U4.4@1689.49,1524.8 U4.4@1679.49,1524.8 1714.22,1490.07 1714.22,1435 1705.44,1426.22 1705.44,1376.56 v1(1707,1375) ; U4.4@1694.17,1524.8 ccw(c1729.63,1524.8) 1704.56,1499.73 cw(c1729.63,1524.8) U4.4@1694.17,1524.8 ; v1@1700.79,1381.21 ccw(c1689.57,1392.43) 1705.44,1392.43 cw(c1689.57,1392.43) v1@1700.79,1381.21 ; 1705.44,1399.96 ccw(c1731.96,1399.96) 1713.21,1381.21 cw(c1731.96,1399.96) 1705.44,1399.96
VSSA: C6.2 R1.1 U1.8 U2.12 | length 507.9
  Top Layer w6: C6.2@1275,2125.43 1314.57,2165 1385,2165 ; R1.1@1385.43,2185.43 R1.1@1385.43,2205
  Top Layer w10: R1.1@1385.43,2185.43 1385,2185 1385,2165 ; U1.8@1560.99,2077.25 1543.24,2095 1485.05,2095 U2.12@1465.92,2114.12 1443.73,2136.32 1405.87,2136.32 1385,2157.19 1385,2165 ; 1385,2165 cw(c1410.03,2165) 1395.93,2185.68 ccw(c1410.03,2165) 1385,2165 ; 1385,2165 ccw(c1358.77,2165) 1374.36,2186.09 cw(c1358.77,2165) 1385,2165 ; U2.12@1480.07,2099.98 ccw(c1492.09,2112) 1492.09,2095 cw(c1492.09,2112) U2.12@1480.07,2099.98
pads on no net: J1.0 J1.5 U3.4 U4.1
copper on no net:
  other v1: 2140,1280 2140,1370 2140,1410 2140,1460 2140,1500 2140,1590 1195,2890 1230,2890 1265,2890

## Polygon pours and split planes (outlines as drawn)
GND on Top Layer "Top Layer-No Net" (solid, remove dead copper, pour order 6): 1385.43,2205 1231,2205 1201,2235 1200,2236 1200,2810 1205,2810 1240,2845 1375,2845 1395,2825 1526.57,2693.43 1526.57,2635 1544.57,2635 1654.57,2525 1605,2475.43 1605,2465 1630,2440 1625,2435 1625,2400.43 1625,2396.3 1580.22,2351.53 1580.22,2278.21 1580.22,2270.01 1528.65,2218.43 1527.84,2219.24 1500,2219.24 1465.76,2219.24 1435,2250 1390,2205 1385.43,2205
GND on Top Layer "Top Layer-No Net" (solid, remove dead copper, pour order 8): 1440,2790 1526.57,2703.43 1526.57,2635 1544.57,2635 1654.57,2525 1654.57,2495.43 1725,2425 1729.57,2420.43 1729.57,2335 1800.43,2335 1822.43,2356.99 1845,2356.99 1883.01,2356.99 1885,2355 1895,2365 2037,2365 2040.53,2365 2065.53,2390 2070,2394.47 2070,2570 2070,2825 2045,2850 1470,2850 1465,2850 1450,2835 1440,2825 1440,2790
GND on Bottom Layer "Top Layer-No Net" (solid, remove dead copper, pour order 5): 2140,1590 2139.63,1590.37 2015,1590.37 1941,1516.37 1941,1426 1941,1361 1910,1330 1867.63,1330 1807.85,1270.22 1639.78,1270.22 1634.78,1270.22 1610,1295 1595,1295 1610,1295 1585,1320 1535,1320 1470,1385 1465,1390 1440,1390 1440,1395 1460,1415 1480.43,1435.43 1480.43,1465 1480.43,1465.43 1550,1535 1585,1570 1585,1585 1625,1625 1679.57,1625 1695,1625 1755.22,1685.22 1755.22,1847.34 1930,2022.11 1930,2095 1730,2295 1718.16,2306.84 1605,2306.84 1518.16,2220 1605,2306.84 1605,2655.04 1505.04,2755 1435,2755 1280,2755 1240,2715 1241,2714 1241,2290 1241,2284 1281,2244 1435,2244 1435,2215.22 1429.78,2210 1450,2189.78 1450,2178.94 1450,2150 1365,2065 1320,2020 1230,2020 1225,2020 1200,1995 1200,1895 1200,1880 1235,1845 1245,1835 1345,1835 1505,1835 1580,1760 1580,1670 1500,1670 1430,1600 1240,1410 1240,1230 1245,1225 2140,1225 2140,1590

## Keep-outs
Keep-Out Layer:
  lines w6: 995,1035 2285,1035 2285,2960 995,2960 995,1035

## Other copper
Top Layer:
  rectangle net GND: 1995,1487.18 2010,1530

## Silkscreen, mask and mechanical layers (free items; w line width, h text height)
Top Overlay:
  lines w10: 1190,1490 1210,1490 1210,1300 1230,1280 ; 1190,2375 1220,2375 1220,2545 ; 1195,1590 1225,1590 1225,1900 ; 1195,2290 1225,2290 1225,1980 ; 1220,2620 1220,2695 ; 1300,1270 1625,1270 1635,1260 1635,1240 ; 1740,1240 1740,1260 1750,1270 1850,1270 ; 1920,1270 1975,1270 ; 2050,2175 2050,1990 2085,1990 ; 2050,2240 2050,2345
  text "C0" at 1005,2865 h75
  text "3V3" at 1285,2785 h75 r90
  text "GND" at 1240,2775 h75 r90
  text "C1" at 1005,2770 h75
  text "D2" at 2200,2770 h75
  text "B9" at 1555,2760 h75 r90
  text "B8" at 1655,2760 h75 r90
  text "B7" at 1755,2760 h75 r90
  text "B6" at 1855,2760 h75 r90
  text "B5" at 1955,2760 h75 r90
  text "B4" at 2020,2760 h75 r90
  text "B3" at 2080,2760 h75 r90
  text "BOOT0" at 1515,2715 h75
  text "RESET" at 1860,2715 h75
  text "C" at 2215,2715 h75
  text "C2" at 1005,2670 h75
  text "13" at 2200,2670 h75
  text "C" at 2215,2615 h75
  text "C3" at 1005,2570 h75
  text "12" at 2200,2570 h75
  text "C" at 1195,2560 h100
  text "C" at 2215,2515 h75
  text "C4" at 1005,2470 h75
  text "11" at 2200,2470 h75
  text "C" at 2215,2415 h75
  text "C5" at 1005,2370 h75
  text "10" at 2200,2370 h75
  text "A0" at 1005,2270 h75
  text "C9" at 2200,2270 h75
  text "VCC" at 1875,2235 h75 r90
  text "GND" at 1925,2235 h75 r90
  text "SWD" at 1975,2235 h75 r90
  text "SCL" at 2025,2235 h75 r90
  text "C" at 2030,2185 h100
  text "A1" at 1005,2170 h75
  text "C8" at 2200,2170 h75
  text "A2" at 1005,2070 h75
  text "C7" at 2200,2070 h75
  text "A3" at 1005,1970 h75
  text "C6" at 2200,1970 h75
  text "A" at 2215,1915 h75
  text "A" at 1195,1910 h100
  text "A4" at 1005,1870 h75
  text "15" at 2200,1870 h75
  text "A" at 2215,1815 h75
  text "A5" at 1005,1770 h75
  text "14" at 2200,1770 h75
  text "SCK" at 1240,1755 h75
  text "A" at 2215,1715 h75
  text "A6" at 1005,1670 h75
  text "13" at 2200,1670 h75
  text "MISO" at 1235,1665 h75
  text "A7" at 1005,1570 h75
  text "MOSI" at 1235,1570 h75
  text "B0" at 1005,1470 h75
  text "BT1" at 1355,1470 h75
  text "B1" at 1005,1370 h75
  text "GND" at 1295,1280 h75
  text "TX" at 1435,1280 h75
  text "RX" at 1535,1280 h75
  text "VCC" at 1635,1280 h75
  text "B2" at 1005,1270 h75
  text "B" at 1240,1250 h100
  text "A" at 1860,1250 h100
  text "B" at 1115,1080 h75 r90
  text "B" at 1215,1080 h75 r90
  text "B" at 1315,1080 h75 r90
  text "B" at 1415,1080 h75 r90
  text "B" at 1515,1080 h75 r90
  text "B" at 1615,1080 h75 r90
  text "A" at 1915,1080 h75 r90
  text "A" at 2015,1080 h75 r90
  text "A" at 2115,1080 h75 r90
  text "10" at 1160,1060 h75 r90
  text "11" at 1265,1060 h75 r90
  text "12" at 1365,1060 h75 r90
  text "13" at 1465,1060 h75 r90
  text "14" at 1565,1060 h75 r90
  text "15" at 1665,1060 h75 r90
  text "A8" at 1765,1060 h75 r90
  text "A9" at 1865,1060 h75 r90
  text "10" at 1965,1060 h75 r90
  text "11" at 2065,1060 h75 r90
  text "12" at 2165,1060 h75 r90